# Altium PCB PCB1.PcbDoc
Units mm, origin at the board's own origin, x right, y up, seen from the top; angles counter-clockwise.
Board outline 50 x 40 mm, 2 copper layers (Top Layer, Bottom Layer); 10 components, 7 nets, 30 pads, 0 vias.
Unrouted connection lines stored in the file: 2.
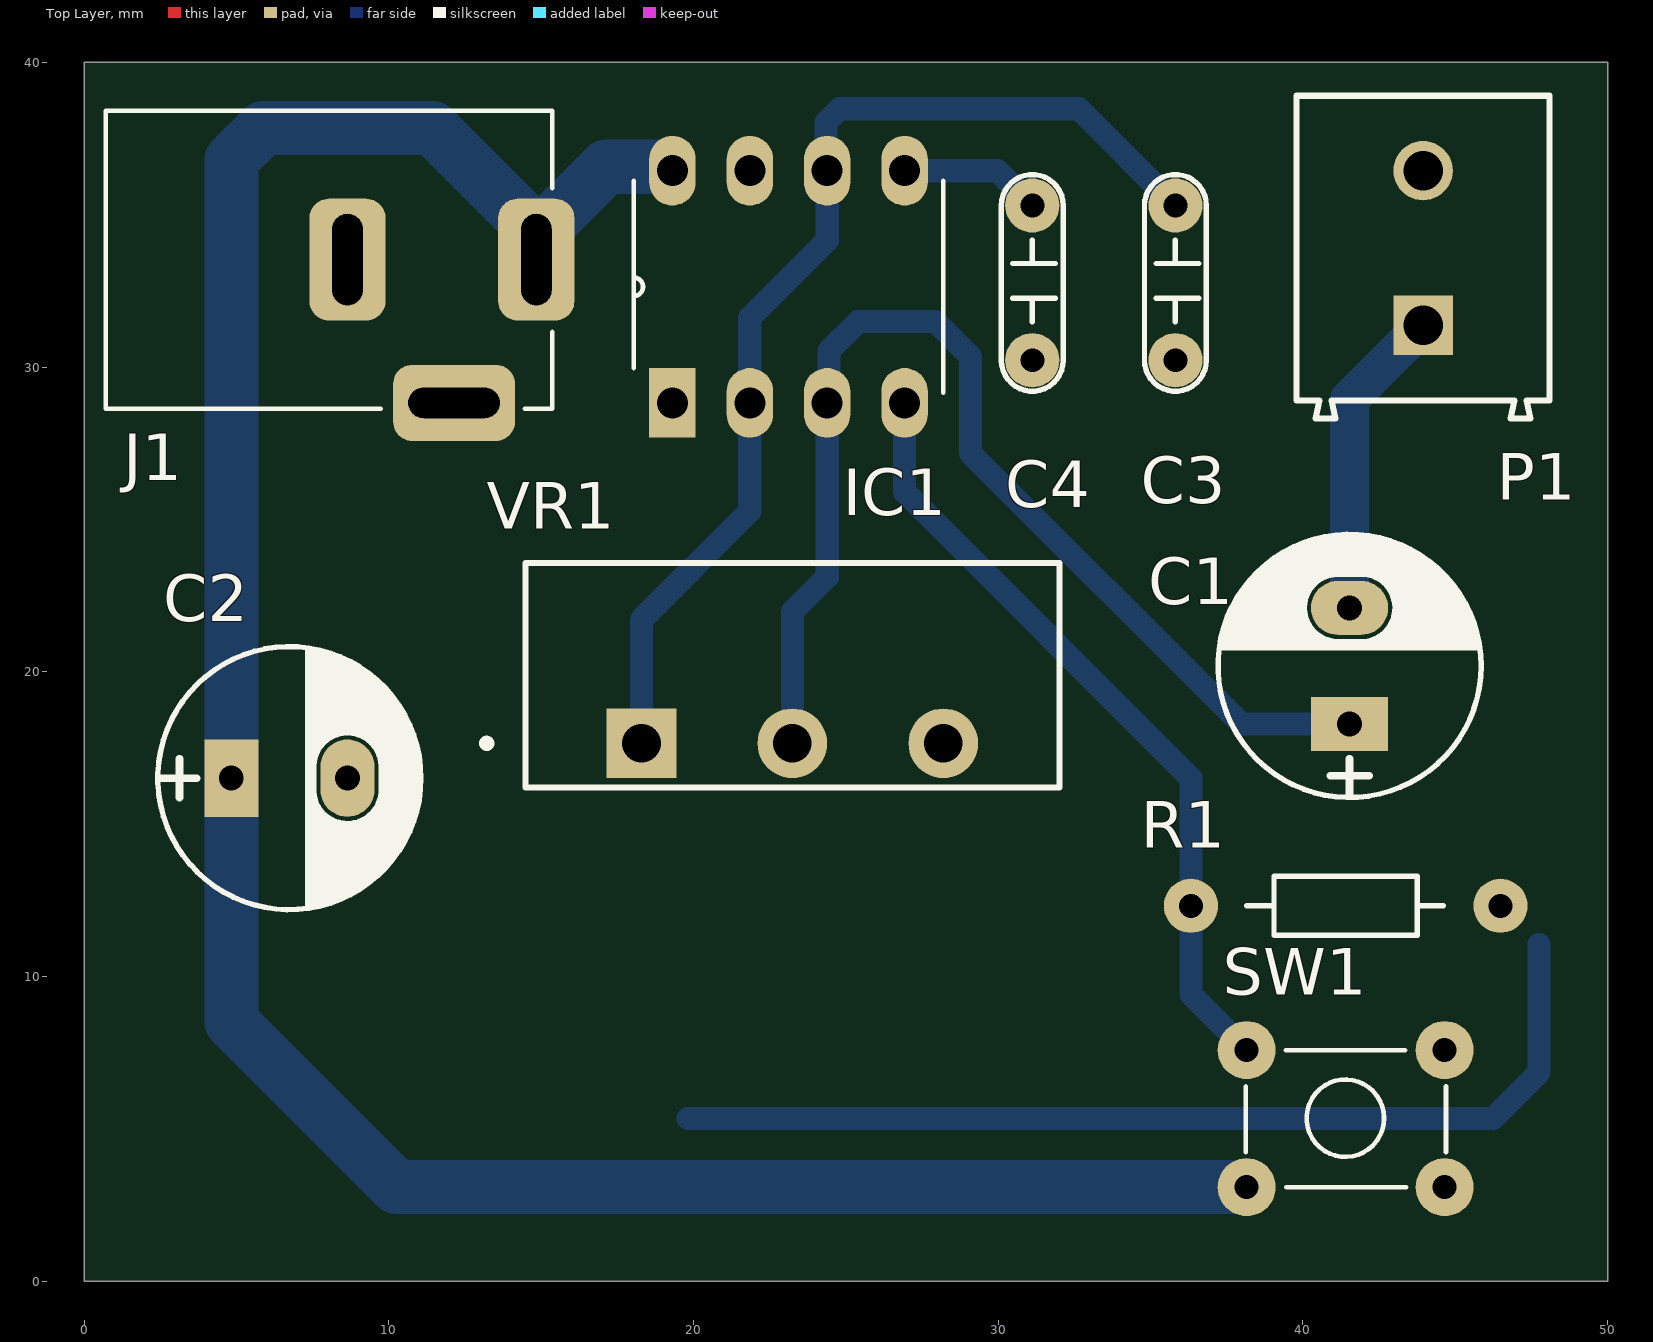
[diagram p0: Top Layer view]
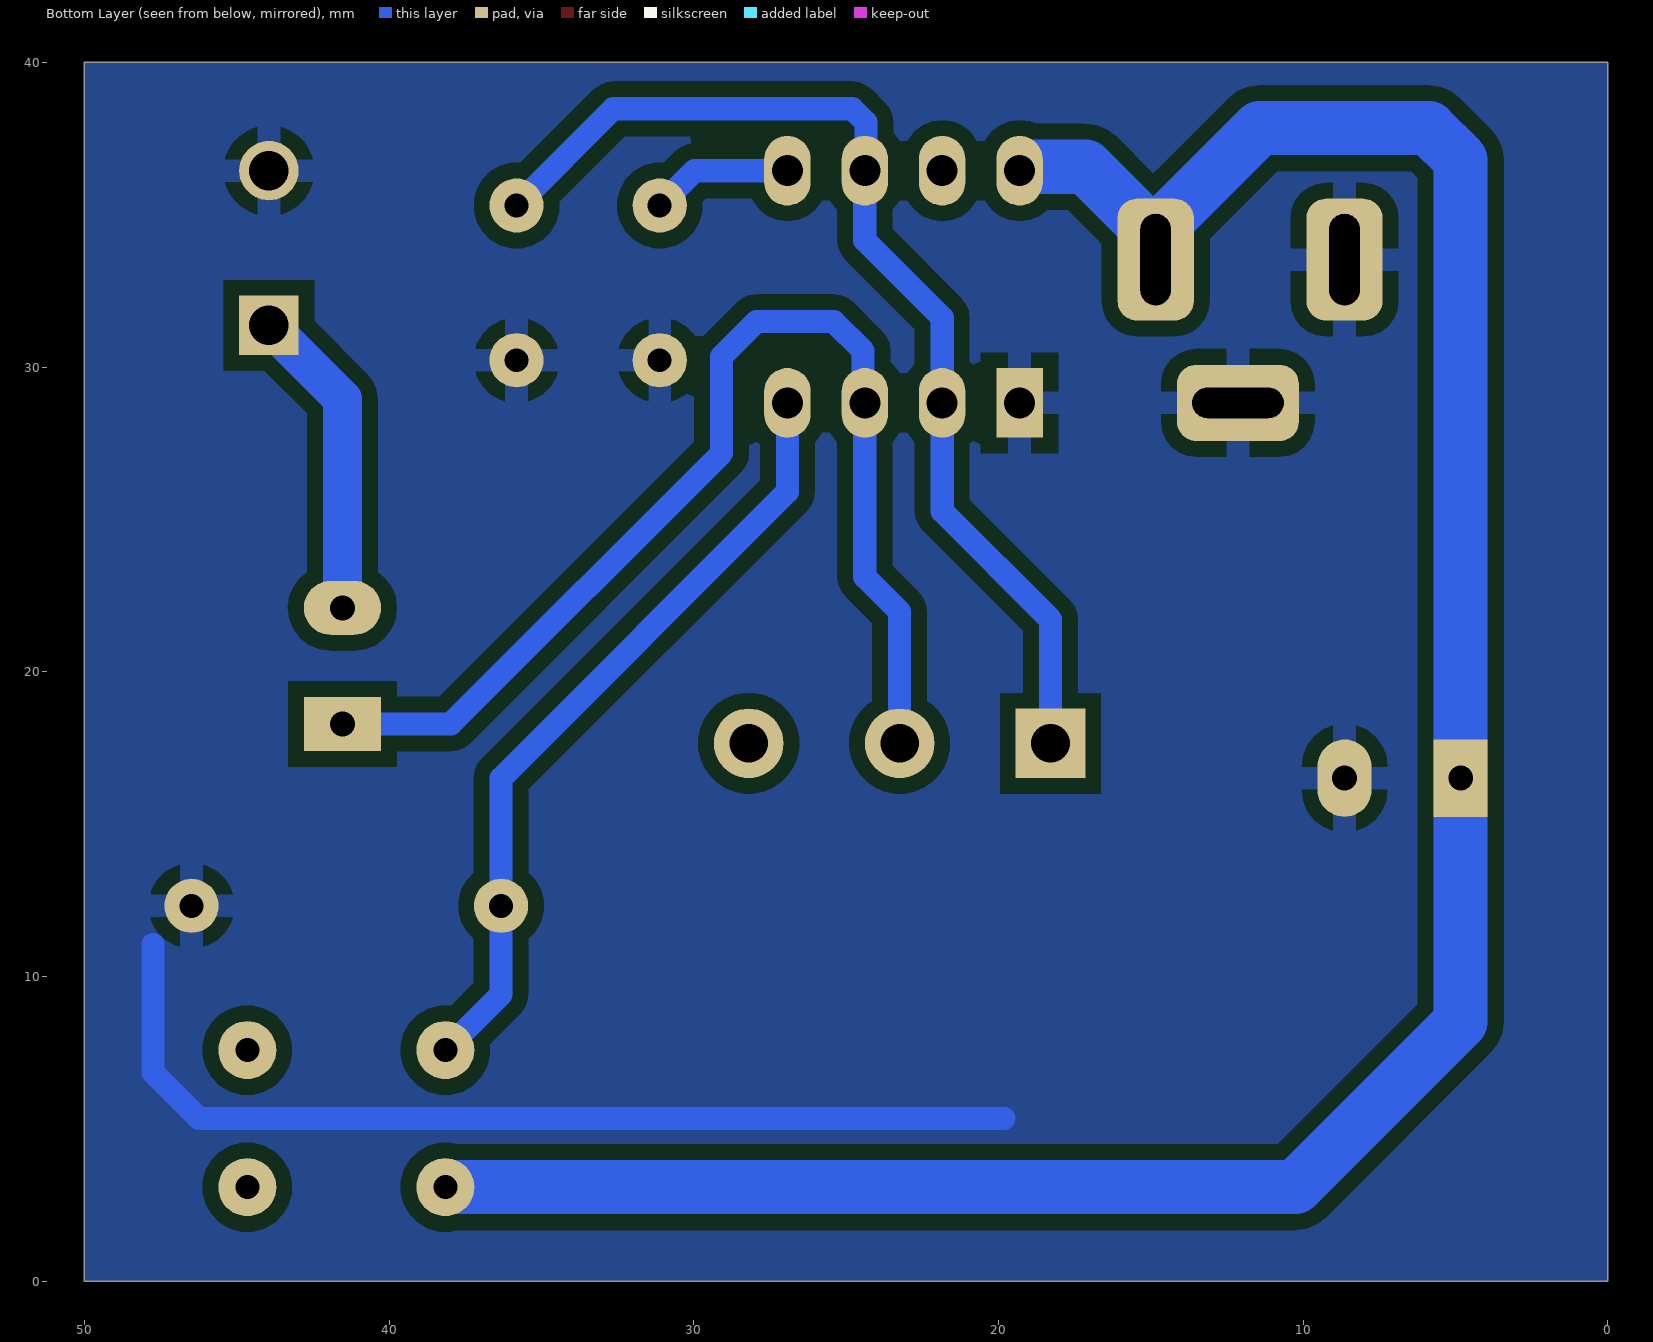
[diagram p1: Bottom Layer view, seen from below]
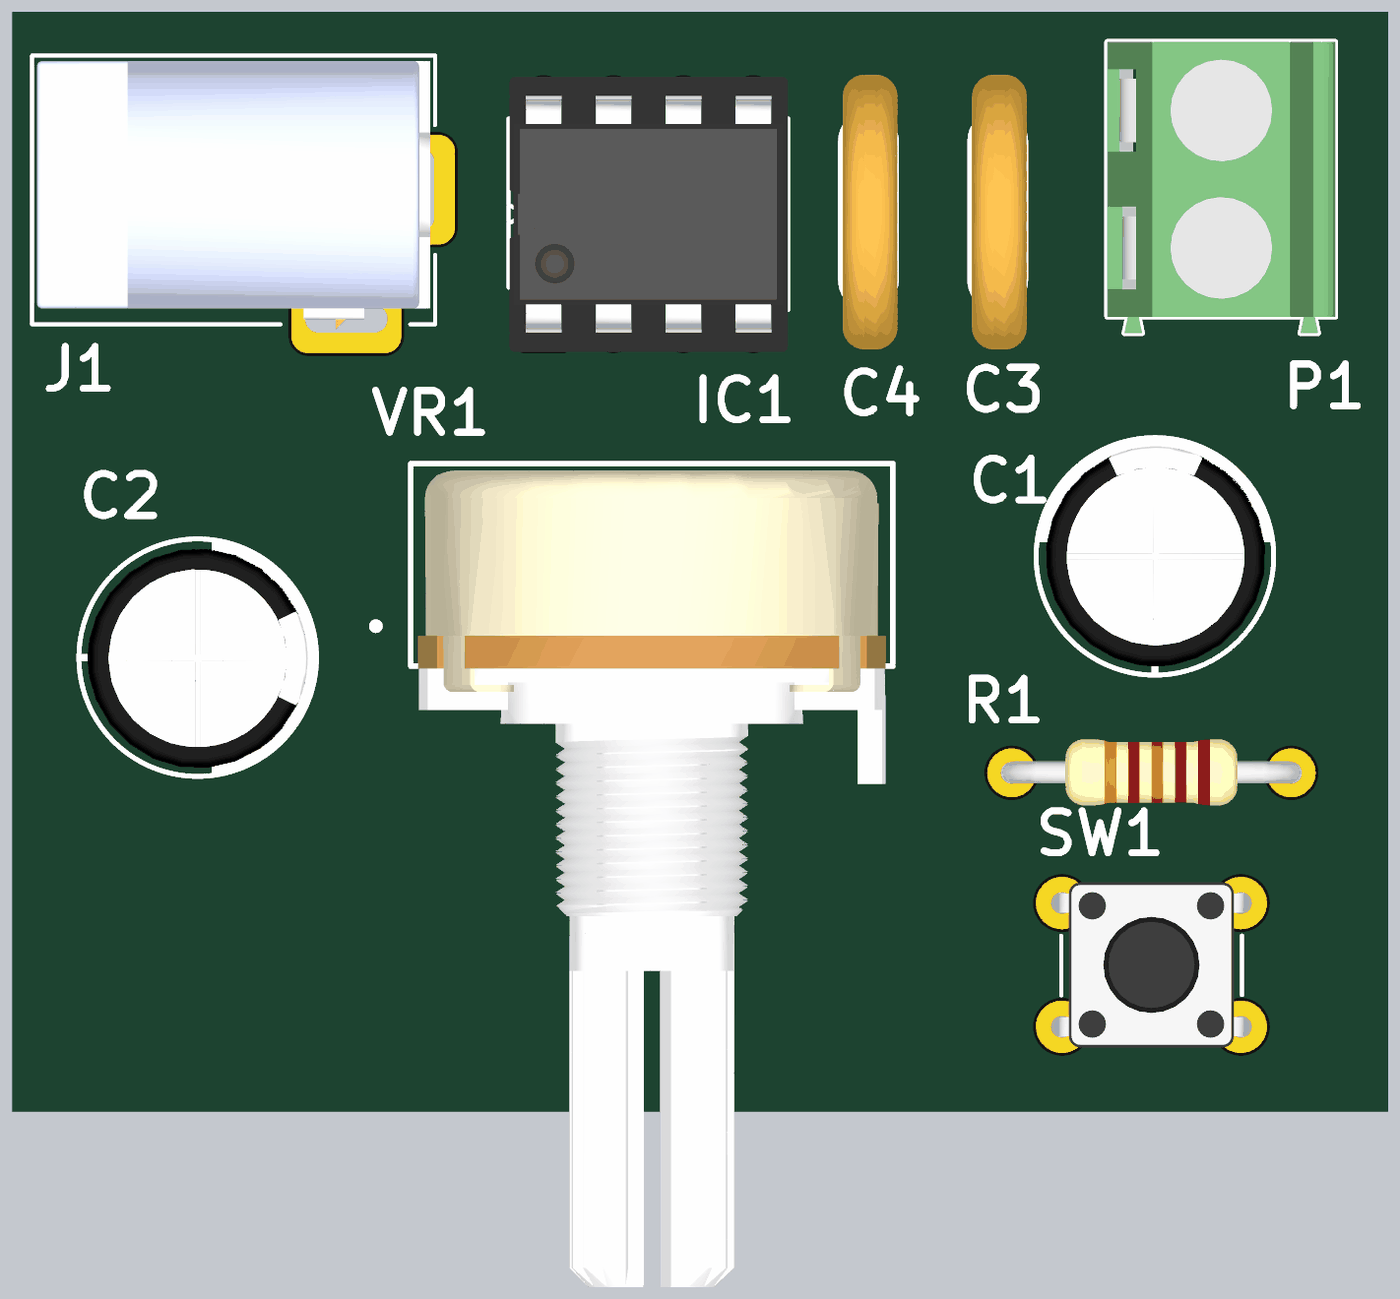
[diagram p2: 3D render of the assembled board from above, using the file's embedded part models]

## Layer stack, top to bottom
Top Solder: solder mask 0.0102, Solder Resist, Dk 3.5
Top Layer: signal copper 0.0356
Dielectric 1: dielectric 0.32, FR-4, Dk 4.8
Bottom Layer: signal copper 0.0356
Bottom Solder: solder mask 0.0102, Solder Resist, Dk 3.5

## Board outline
0,0 50,0 50,40 0,40

## Design rules (kind name [scope] priority, off if disabled: settings)
Clearance [All] p1: gap=0.254 ignorepadtopadclearanceinfootprint=FALSE except(0: Arc-Hole Track-Hole SMDPad-Hole THPad-Hole Via-Hole Fill-Hole Poly-Hole Region-Hole Text-Hole; 0.508: Arc-Fill Arc-Poly Arc-Region Track-Fill Track-Poly Track-Region THPad-Fill THPad-Poly THPad-Region)
PolygonConnect [All] p1: connectstyle=Relief reliefconductorwidth=0.762 reliefentries=4 polygonreliefangle="90 Angle" airgapwidth=0.508
RoutingVias [All] p1: holewidth=0.711 width=1.27 viastyle="Through Hole" minholewidth=0.711 minwidth=1.27 maxholewidth=0.711 maxwidth=1.27
SolderMaskExpansion [All] p1: expansion=0.102 istentingtop=FALSE
Width [All] p1: maxlimit=1.778 minlimit=0.762 preferedwidth=1.27 minimp=50.000000 maximp=50.000000 favimp=50.000000
30 further rules are at their usual default settings.

## Components (designator, comment, footprint, x,y, rotation, side; value= is the part's Value field where it differs from the comment)
C1 "100uF_50V" CAP_ELEC_100uF_50V 41.529,20.193 r90 top
C2 "100uF_50V" CAP_ELEC_100uF_50V 6.731,16.51 r0 top
C3 "0.1uF" CAP_CER_105 35.814,32.766 r270 top
C4 "0.1uF" CAP_CER_105 31.115,32.766 r270 top
IC1 "NE555" DIP8 23.114,32.638 r90 top
J1 "JACK_DC_5.5" DC5.5/2.1 1.136,38.028 r270 top
P1 "SPEAKER" DOMINO_2 43.942,33.909 r90 top
R1 "1K" R1/4W 41.402,12.319 r0 top
SW1 "SW" SW4_2 41.402,5.334 r180 top value="SW chip 4 pin"
VR1 "1K" VR_VOLUME 23.241,24.328 r0 top

## Footprints (in the part's own frame and the unit in brackets; to place one, negate y for a bottom-side part, rotate by r counter-clockwise, add the part's x,y. Pads: shape width x height; smd on the part's side, far side on the other; paste and mask are expansions set on the pad)
CAP_CER_105 [mil] "Disk_Capacitor_d10_RM5"
  round 70 hole 31: 1(-100,0) 2(100,0)
  silkscreen extent -140,-40 140,40, body extent -195,-37 199,42, height 422
CAP_ELEC_100uF_50V [mil] "100uF 50V electr 8 x14mm P.diameter 4mm-Black-White"
  rect 70x100 hole 32: 1(-75,0)
  oval 70x100 hole 32: 2(75,0)
  silkscreen extent -170,-170 170,170, body extent -157,-158 157,156, height 551
DC5.5/2.1 [mm] "DC JACK 5.5/2.1mm"
  rrect50% 4x2.5 hole 1 slot 3 at 0 deg paste+1: 1(4.5,13.7) 3(4.5,7.5)
  rrect50% 2.5x4 hole 1 slot 3 at 90 deg paste+1: 2(9.2,11)
  silkscreen extent -0.38,-0.43 9.4,14.22, body extent -0.18,-0.25 9.22,14.05, height 11.85
DIP8 [mil]
  rect 90x60 hole 40: 1(-150,150)
  oval 90x60 hole 40: 2(-150,50) 3(-150,-50) 4(-150,-150) 5(150,-150) 6(150,-50) 7(150,50) 8(150,150)
  silkscreen extent -137,-200 137,200, body extent -197,-200 197,199, height 263
DOMINO_2 [mm] "Domino 5.08 2P"
  rect 1.95x1.95 hole 1.3: 1(-2.54,0)
  round 1.95 hole 1.3: 2(2.54,0)
  silkscreen extent -5.6,-4.15 5,4.15, body extent -5.6,-4.15 5,4.15, height 10.05
R1/4W [mil] "R 1/4W, 2 Pin, 350mil"
  round 70 hole 31: 1(-200,0) 2(200,0)
  silkscreen extent -128,-38 126,38, body extent -213,-46 213,48, height 111
SW4_2 [mm] "SW button 4pin, 6x6x7.0"
  round 1.905 hole 0.787: 1(-3.25,2.25) 2(3.25,-2.25) 3(3.25,2.25) 4(-3.25,-2.25)
  silkscreen extent -3.29,-2.25 3.28,2.26, body extent -3.86,-3 3.86,3, height 7
VR_VOLUME [mil] "Variable Resistor Volume"
  rect 90x90 hole 50 paste-39370.1 mask+0: 1(-195,-262.8)
  round 90 hole 50 paste-39370.1 mask+0: 2(0,-262.8) 3(195,-262.8)
  silkscreen extent -400,-320 345,-30, body extent -335,-1209 335,-40, height 875

## Part data
C1 C2: library part CAP_ELEC_100uF_50V, "Electrolytic Capacitor 100uF 50V"
C3 C4: library part CAP_CER_105, "Capacitor Ceramic 105 1uF"
IC1: "555 Type, Timer/Oscillator (Single) IC 500kHz 8-DIP"
J1: "Jack DC 5.5x2.1"
P1: library part DOMINO_2, "Domino 2"
R1: library part RES_1K_1/4W, "Resistor Through-Hole  1K 1/4W"
SW1: library part SW4, "Switch button 4 pin"
VR1: library part "VR_Volume 1K", "Variable_Resistor Volume 1K"

## Nets (pads, with @x,y where several pads share a name; then routed paths per layer and width w, separated by ;. In a path a pad name is that pad's centre, name@x,y a point inside that pad or via, vN(x,y) a via of type N, cw(c..) or ccw(c..) an arc to the next point about the centre after c; other vN are vias at no path point)
GND: C2.2 C3.2 C4.2 IC1.1 J1.2 J1.3 P1.2 R1.2 | length 35.6
  Bottom Layer w0.762: C2.2 8.636,16.404 C2.2@9.105,15.935 ; 19.812,5.334 46.228,5.334 47.752,6.858 47.752,11.049
  Bottom Layer w1.778: J1.3@8.636,32.778 J1.3 ; J1.2@11.025,29.189 11.386,28.828 J1.2 ; P1.2@43.909,36.416 P1.2 P1.2@43.975,36.416
NetC1_1: C1.1 IC1.3 VR1.2 | length 38.2
  Bottom Layer w0.762: VR1.2 23.241,21.971 24.384,23.114 IC1.3 24.438,28.882 24.438,30.534 25.4,31.496 27.94,31.496 29.083,30.353 29.083,27.178 37.973,18.288 C1.1
NetC1_2: C1.2 P1.1 | length 10.3
  Bottom Layer w1.27: C1.2 41.529,28.956 P1.1
NetC3_1: C3.1 IC1.2 IC1.6 VR1.1 | length 35.9
  Bottom Layer w0.762: VR1.1 18.288,21.717 21.844,25.273 IC1.2 21.844,31.623 24.384,34.163 IC1.6 24.348,36.484 24.348,38.035 24.795,38.481 32.639,38.481 C3.1
NetC4_1: C4.1 IC1.5 | length 4.7
  Bottom Layer w0.762: IC1.5 29.973,36.448 C4.1
NetIC1_4: IC1.4 R1.1 SW1.2 SW1.4 | length 25.9
  Bottom Layer w0.762: IC1.4 26.924,25.908 36.322,16.51 R1.1 36.322,9.414 SW1.2
VCC: C2.1 IC1.8 J1.1 SW1.1 SW1.3 | length 80.8
  Bottom Layer w1.778: J1.1@14.475,34.801 11.43,37.846 5.868,37.846 4.826,36.804 C2.1 4.826,8.509 10.251,3.084 SW1.3 ; J1.1 14.836,34.278 17.134,36.576 IC1.8@18.742,36.576
pads on no net: IC1.7 VR1.3

## Polygon pours and split planes (outlines as drawn)
GND on Bottom Layer "GND_L02_P000" (solid, remove dead copper, pour order 0): -0.009,0.004 0,0.013 0,40.005 50.038,40.005 50.001,39.968 50.001,0.004

## Silkscreen, mask and mechanical layers (free items; w line width, h text height)
Mechanical 1:
  the board outline again, w0.254